# EAGLE board CT_schematic (EAGLE 7.6.0)

Size 100 x 80 mm. Coordinates in mm from the lower left corner, seen from the top.
Outline: 0,0 100,0 100,80 0,80 0,0
Copper layers (1*16): Top 0.035mm / dielectric 1.5mm / Bottom 0.035mm
Design rules "default": minimum track width 10mil, minimum drill 24mil, track to track 8mil, track to pad 8mil, pad to pad 8mil, via to via 8mil, smd to smd 8mil, copper to edge 40mil, drill to drill 8mil, minimum pad ring 10mil, minimum via ring 8mil, stop-mask expansion 4mil, vias tented up to drill 0mil, thermal gap 10mil

## Footprints (pad centres in the part's own frame; a part is rotated, then mirrored left to right if it is on the bottom)
C0603 = smd 0.8 x 0.8: 1 -0.762,0; 2 0.762,0
C0402 = smd 0.5 x 0.5: 1 -0.508,0; 2 0.508,0
C1210 = smd 1.2 x 2.5: 1 -1.524,0; 2 1.524,0
EXV-9H = smd 3.505 x 1.676: 1 -2.857,0; 2 2.857,0
L0603 = smd 0.8 x 0.8: 1 -0.762,0; 2 0.762,0
PJ-037B_PACKAGE = drill 3.7 square: 1 12,0 | drill 3.2 square: 2 6,0
R0603 = smd 0.8 x 0.8: 1 -0.762,0; 2 0.762,0
UFBGA132 = smd 0.32 x 0.32: A1 -2.75,2.75; A2 -2.25,2.75; A3 -1.75,2.75; A4 -1.25,2.75; A5 -0.75,2.75; A6 -0.25,2.75; A7 0.25,2.75; A8 0.75,2.75; A9 1.25,2.75; A10 1.75,2.75; A11 2.25,2.75; A12 2.75,2.75; B1 -2.75,2.25; B2 -2.25,2.25; B3 -1.75,2.25; B4 -1.25,2.25; B5 -0.75,2.25; B6 -0.25,2.25; B7 0.25,2.25; B8 0.75,2.25; B9 1.25,2.25; B10 1.75,2.25; B11 2.25,2.25; B12 2.75,2.25; C1 -2.75,1.75; C2 -2.25,1.75; C3 -1.75,1.75; C4 -1.25,1.75; C5 -0.75,1.75; C6 -0.25,1.75; C7 0.25,1.75; C8 0.75,1.75; C9 1.25,1.75; C10 1.75,1.75; C11 2.25,1.75; C12 2.75,1.75; D1 -2.75,1.25; D2 -2.25,1.25; D3 -1.75,1.25; D4 -1.25,1.25; D5 -0.75,1.25; D6 -0.25,1.25; D7 0.25,1.25; D8 0.75,1.25; D9 1.25,1.25; D10 1.75,1.25; D11 2.25,1.25; D12 2.75,1.25; E1 -2.75,0.75; E2 -2.25,0.75; E3 -1.75,0.75; E4 -1.25,0.75; E9 1.25,0.75; E10 1.75,0.75; E11 2.25,0.75; E12 2.75,0.75; F1 -2.75,0.25; F2 -2.25,0.25; F3 -1.75,0.25; F4 -1.25,0.25; F6 -0.25,0.25; F7 0.25,0.25; F9 1.25,0.25; F10 1.75,0.25; F11 2.25,0.25; F12 2.75,0.25; G1 -2.75,-0.25; G2 -2.25,-0.25; G3 -1.75,-0.25; G4 -1.25,-0.25; G6 -0.25,-0.25; G7 0.25,-0.25; G9 1.25,-0.25; G10 1.75,-0.25; G11 2.25,-0.25; G12 2.75,-0.25; H1 -2.75,-0.75; H2 -2.25,-0.75; H3 -1.75,-0.75; H4 -1.25,-0.75; H9 1.25,-0.75; H10 1.75,-0.75; H11 2.25,-0.75; H12 2.75,-0.75; J1 -2.75,-1.25; J2 -2.25,-1.25; J3 -1.75,-1.25; J4 -1.25,-1.25; J5 -0.75,-1.25; J6 -0.25,-1.25; J7 0.25,-1.25; J8 0.75,-1.25; J9 1.25,-1.25; J10 1.75,-1.25; J11 2.25,-1.25; J12 2.75,-1.25; K1 -2.75,-1.75; K2 -2.25,-1.75; K3 -1.75,-1.75; K4 -1.25,-1.75; K5 -0.75,-1.75; K6 -0.25,-1.75; K7 0.25,-1.75; K8 0.75,-1.75; K9 1.25,-1.75; K10 1.75,-1.75; K11 2.25,-1.75; K12 2.75,-1.75; L1 -2.75,-2.25; L2 -2.25,-2.25; L3 -1.75,-2.25; L4 -1.25,-2.25; L5 -0.75,-2.25; L6 -0.25,-2.25; L7 0.25,-2.25; L8 0.75,-2.25; L9 1.25,-2.25; L10 1.75,-2.25; L11 2.25,-2.25; L12 2.75,-2.25; M1 -2.75,-2.75; M2 -2.25,-2.75; M3 -1.75,-2.75; M4 -1.25,-2.75; M5 -0.75,-2.75; M6 -0.25,-2.75; M7 0.25,-2.75; M8 0.75,-2.75; M9 1.25,-2.75; M10 1.75,-2.75; M11 2.25,-2.75; M12 2.75,-2.75
TFBGA-153 = smd 0.3 x 0.3: A1 -3.25,3.25; A2 -2.75,3.25; A3 -2.25,3.25; A4 -1.75,3.25; A5 -1.25,3.25; A6 -0.75,3.25; A7 -0.25,3.25; A8 0.25,3.25; A9 0.75,3.25; A10 1.25,3.25; A11 1.75,3.25; A12 2.25,3.25; A13 2.75,3.25; A14 3.25,3.25; B1 -3.25,2.75; B2 -2.75,2.75; B3 -2.25,2.75; B4 -1.75,2.75; B5 -1.25,2.75; B6 -0.75,2.75; B7 -0.25,2.75; B8 0.25,2.75; B9 0.75,2.75; B10 1.25,2.75; B11 1.75,2.75; B12 2.25,2.75; B13 2.75,2.75; B14 3.25,2.75; C1 -3.25,2.25; C2 -2.75,2.25; C3 -2.25,2.25; C4 -1.75,2.25; C5 -1.25,2.25; C6 -0.75,2.25; C7 -0.25,2.25; C8 0.25,2.25; C9 0.75,2.25; C10 1.25,2.25; C11 1.75,2.25; C12 2.25,2.25; C13 2.75,2.25; C14 3.25,2.25; D1 -3.25,1.75; D2 -2.75,1.75; D3 -2.25,1.75; D4 -1.75,1.75; D12 2.25,1.75; D13 2.75,1.75; D14 3.25,1.75; E1 -3.25,1.25; E2 -2.75,1.25; E3 -2.25,1.25; E5 -1.25,1.25; E6 -0.75,1.25; E7 -0.25,1.25; E8 0.25,1.25; E9 0.75,1.25; E10 1.25,1.25; E12 2.25,1.25; E13 2.75,1.25; E14 3.25,1.25; F1 -3.25,0.75; F2 -2.75,0.75; F3 -2.25,0.75; F5 -1.25,0.75; F10 1.25,0.75; F12 2.25,0.75; F13 2.75,0.75; F14 3.25,0.75; G1 -3.25,0.25; G2 -2.75,0.25; G3 -2.25,0.25; G5 -1.25,0.25; G10 1.25,0.25; G12 2.25,0.25; G13 2.75,0.25; G14 3.25,0.25; H1 -3.25,-0.25; H2 -2.75,-0.25; H3 -2.25,-0.25; H5 -1.25,-0.25; H10 1.25,-0.25; H12 2.25,-0.25; H13 2.75,-0.25; H14 3.25,-0.25; J1 -3.25,-0.75; J2 -2.75,-0.75; J3 -2.25,-0.75; J5 -1.25,-0.75; J10 1.25,-0.75; J12 2.25,-0.75; J13 2.75,-0.75; J14 3.25,-0.75; K1 -3.25,-1.25; K2 -2.75,-1.25; K3 -2.25,-1.25; K5 -1.25,-1.25; K6 -0.75,-1.25; K7 -0.25,-1.25; K8 0.25,-1.25; K9 0.75,-1.25; K10 1.25,-1.25; K12 2.25,-1.25; K13 2.75,-1.25; K14 3.25,-1.25; L1 -3.25,-1.75; L2 -2.75,-1.75; L3 -2.25,-1.75; L12 2.25,-1.75; L13 2.75,-1.75; L14 3.25,-1.75; M1 -3.25,-2.25; M2 -2.75,-2.25; M3 -2.25,-2.25; M4 -1.75,-2.25; M5 -1.25,-2.25; M6 -0.75,-2.25; M7 -0.25,-2.25; M8 0.25,-2.25; M9 0.75,-2.25; M10 1.25,-2.25; M11 1.75,-2.25; M12 2.25,-2.25; M13 2.75,-2.25; M14 3.25,-2.25; N1 -3.25,-2.75; N2 -2.75,-2.75; N3 -2.25,-2.75; N4 -1.75,-2.75; N5 -1.25,-2.75; N6 -0.75,-2.75; N7 -0.25,-2.75; N8 0.25,-2.75; N9 0.75,-2.75; N10 1.25,-2.75; N11 1.75,-2.75; N12 2.25,-2.75; N13 2.75,-2.75; N14 3.25,-2.75; P1 -3.25,-3.25; P2 -2.75,-3.25; P3 -2.25,-3.25; P4 -1.75,-3.25; P5 -1.25,-3.25; P6 -0.75,-3.25; P7 -0.25,-3.25; P8 0.25,-3.25; P9 0.75,-3.25; P10 1.25,-3.25; P11 1.75,-3.25; P12 2.25,-3.25; P13 2.75,-3.25; P14 3.25,-3.25
PC28F512P33BFD = smd 0.45 x 0.45: A1 0,0; A2 1,0; A3 2,0; A4 3,0; A5 4,0; A6 5,0; A7 6,0; A8 7,0; B1 0,-1; B2 1,-1; B3 2,-1; B4 3,-1; B5 4,-1; B6 5,-1; B7 6,-1; B8 7,-1; C1 0,-2; C2 1,-2; C3 2,-2; C4 3,-2; C5 4,-2; C6 5,-2; C7 6,-2; C8 7,-2; D1 0,-3; D2 1,-3; D3 2,-3; D4 3,-3; D5 4,-3; D6 5,-3; D7 6,-3; D8 7,-3; E1 0,-4; E2 1,-4; E3 2,-4; E4 3,-4; E5 4,-4; E6 5,-4; E7 6,-4; E8 7,-4; F1 0,-5; F2 1,-5; F3 2,-5; F4 3,-5; F5 4,-5; F6 5,-5; F7 6,-5; F8 7,-5; G1 0,-6; G2 1,-6; G3 2,-6; G4 3,-6; G5 4,-6; G6 5,-6; G7 6,-6; G8 7,-6; H1 0,-7; H2 1,-7; H3 2,-7; H4 3,-7; H5 4,-7; H6 5,-7; H7 6,-7; H8 7,-7
ABS07-32.768KHZ-7-T = smd 1.1 x 2.4: 1 -2.5,0; 2 0,0
ASFL1 = smd 1.7 x 1.5: 1 -1.27,-1.1; 2 1.27,-1.1; 3 1.27,1.1; 4 -1.27,1.1
WSON-8 = smd 0.3 x 0.6: 1 -0.75,0; 2 0.05,0; 3 0.85,0; 4 1.65,0; 5 1.65,3.8; 6 0.85,3.8; 7 0.05,3.8; 8 -0.75,3.8 | smd 3 x 2.6: PAD 0.45,1.9
SON-6 = smd 0.55 x 0.3: 1 -0.355,0.5 | smd 0.52 x 0.3: 2 -0.37,0; 3 -0.37,-0.5; 4 0.37,-0.5; 5 0.37,0; 6 0.37,0.5
SW_4-1437565-2 = smd 1.4 x 2.1: 1 -2.23,4.55; 2 -2.23,-4.55; 3 2.23,4.55; 4 2.23,-4.55
LGM67K-G1J2-24-Z = smd 0.8 x 1.4: A -2,0; C 0,0
NC7SZ125M5X = smd 1.3 x 0.7: 1 -1.3,0.95; 2 -1.3,0; 3 -1.3,-0.95; 4 1.3,-0.95; 5 1.3,0.95
DUMMY_PACKAGE_176 = drill 0.3: 1 0,-1; 2 1.5,-1; 3 3,-1

## Placement (x,y rotation side)
C1  1e-07  [C0603]  -30.48,60.96 0 top  (outside the outline)
C2  1e-07  [C0603]  -34.29,60.96 0 top  (outside the outline)
C3  1e-07  [C0603]  -38.1,60.96 0 top  (outside the outline)
C4  1e-07  [C0603]  -41.91,60.96 0 top  (outside the outline)
C5  1e-07  [C0603]  -45.72,60.96 0 top  (outside the outline)
C6  1e-07  [C0603]  -49.53,60.96 0 top  (outside the outline)
C7  1e-07  [C0603]  -53.34,60.96 0 top  (outside the outline)
C8  4.7e-06  [C0603]  -15.24,60.96 0 top  (outside the outline)
C9  1e-07  [C0603]  -57.15,60.96 0 top  (outside the outline)
C10  1e-08  [C0603]  -60.96,60.96 0 top  (outside the outline)
C11  1e-06  [C0603]  -64.77,60.96 0 top  (outside the outline)
C12  1e-11  [C0402]  -45.72,66.04 0 top  (outside the outline)
C13  1e-11  [C0402]  -49.53,66.04 0 top  (outside the outline)
C14  1e-07  [C0402]  -53.34,66.04 0 top  (outside the outline)
C15  2.2e-06  [C0603]  -19.05,60.96 0 top  (outside the outline)
C16  2.2e-06  [C0603]  -22.86,60.96 0 top  (outside the outline)
C17  1e-07  [C0402]  -57.15,66.04 0 top  (outside the outline)
C18  1e-07  [C0402]  -60.96,66.04 0 top  (outside the outline)
C19  2.2e-06  [C0603]  -26.67,60.96 0 top  (outside the outline)
C20  1e-07  [C0402]  -64.77,66.04 0 top  (outside the outline)
C21  1e-08  [C0402]  -15.24,71.12 0 top  (outside the outline)
C22  1e-07  [C0402]  -19.05,71.12 0 top  (outside the outline)
C23  1e-08  [C0402]  -22.86,71.12 0 top  (outside the outline)
C24  1e-07  [C0402]  -26.67,71.12 0 top  (outside the outline)
C25  1e-08  [C0402]  -30.48,71.12 0 top  (outside the outline)
C26  1e-08  [C0402]  -34.29,71.12 0 top  (outside the outline)
C27  1e-08  [C0402]  -38.1,71.12 0 top  (outside the outline)
C28  1e-05  [C1210]  -48.26,41.91 0 top  (outside the outline)
C29  1e-05  [C1210]  -54.61,41.91 0 top  (outside the outline)
C30  1e-07  [C0402]  -41.91,71.12 0 top  (outside the outline)
C31  0.0001  [EXV-9H]  -35.56,34.29 0 top  (outside the outline)
C32  0.0001  [EXV-9H]  -46.99,34.29 0 top  (outside the outline)
C33  1e-08  [C0402]  -45.72,71.12 0 top  (outside the outline)
C34  1e-08  [C0402]  -49.53,71.12 0 top  (outside the outline)
C35  1e-08  [C0402]  -53.34,71.12 0 top  (outside the outline)
F1  240.0  [L0603]  -15.24,66.04 0 top  (outside the outline)
J1  PJ-037B  [PJ-037B_PACKAGE]  -41.91,7.62 0 top  (outside the outline)
R2  1000.0  [R0603]  -19.05,66.04 0 top  (outside the outline)
R4  4700.0  [R0603]  -22.86,66.04 0 top  (outside the outline)
R5  4700.0  [R0603]  -26.67,66.04 0 top  (outside the outline)
R6  4700.0  [R0603]  -30.48,66.04 0 top  (outside the outline)
R7  10000.0  [R0603]  -36.83,49.53 0 top  (outside the outline)
R8  34000.0  [R0603]  -41.91,49.53 0 top  (outside the outline)
R9  34000.0  [R0603]  -46.99,49.53 0 top  (outside the outline)
R10  34000.0  [R0603]  -52.07,49.53 0 top  (outside the outline)
R11  34000.0  [R0603]  -57.15,49.53 0 top  (outside the outline)
R12  34000.0  [R0603]  -62.23,49.53 0 top  (outside the outline)
R13  34000.0  [R0603]  -67.31,49.53 0 top  (outside the outline)
R14  34000.0  [R0603]  -15.24,55.88 0 top  (outside the outline)
R15  34000.0  [R0603]  -20.32,55.88 0 top  (outside the outline)
R16  34000.0  [R0603]  -25.4,55.88 0 top  (outside the outline)
R17  34000.0  [R0603]  -30.48,55.88 0 top  (outside the outline)
R18  10000.0  [R0603]  -35.56,55.88 0 top  (outside the outline)
R19  10000.0  [R0603]  -40.64,55.88 0 top  (outside the outline)
R20  10000.0  [R0603]  -45.72,55.88 0 top  (outside the outline)
R21  10000.0  [R0603]  -50.8,55.88 0 top  (outside the outline)
R22  10000.0  [R0603]  -55.88,55.88 0 top  (outside the outline)
R23  100000.0  [R0603]  -21.59,49.53 0 top  (outside the outline)
R24  2231.0  [R0603]  -34.29,66.04 0 top  (outside the outline)
R25  1000.0  [R0603]  -38.1,66.04 0 top  (outside the outline)
R26  10000.0  [R0603]  -60.96,55.88 0 top  (outside the outline)
R27  10000.0  [R0603]  -66.04,55.88 0 top  (outside the outline)
R28  9100.0  [R0603]  -41.91,66.04 0 top  (outside the outline)
R29  680000.0  [R0603]  -26.67,49.53 0 top  (outside the outline)
R30  120000.0  [R0603]  -31.75,49.53 0 top  (outside the outline)
U1  STM32L151QDH6  [UFBGA132]  -44.45,24.13 0 top  (outside the outline)
U2  mtfc4gmcdm  [TFBGA-153]  -20.32,8.89 0 top  (outside the outline)
U3  PC28F512P33BFD  [PC28F512P33BFD]  -58.42,10.16 0 top  (outside the outline)
U4  ABS07-32.768KHZ-7-T  [ABS07-32.768KHZ-7-T]  -27.94,43.18 0 top  (outside the outline)
U5  ASFL1-25MHZ-NCS  [ASFL1]  -26.67,34.29 0 top  (outside the outline)
U6  LP3878SDX-ADJ/NOPB  [WSON-8]  -66.04,20.32 0 top  (outside the outline)
U7  TPS3895ADRYR  [SON-6]  -62.23,69.85 0 top  (outside the outline)
U8  4-1437565-2  [SW_4-1437565-2]  -27.94,24.13 0 top  (outside the outline)
U9  Q65110A2395  [LGM67K-G1J2-24-Z]  -36.83,41.91 0 top  (outside the outline)
U10  nc7sz125m5x  [NC7SZ125M5X]  -59.69,40.64 0 top  (outside the outline)
U11  nc7sz125m5x  [NC7SZ125M5X]  -66.04,40.64 0 top  (outside the outline)
U12  nc7sz125m5x  [NC7SZ125M5X]  -15.24,49.53 0 top  (outside the outline)
U13  Dummy  [DUMMY_PACKAGE_176]  -59.69,71.12 0 top  (outside the outline)

## Library data of the parts
C1-C35 F1 J1 R2 R4-R30 U1-U13 = circuit_tree

## Nets
CLK_CRYSTAL_U1_D1: C12.1 U1.D1 U4.1
CLK_CRYSTAL_U1_E1: C13.1 U1.E1 U4.2
CLK_U1_F1: U1.F1 U5.3
GND: C1.2 C2.2 C3.2 C4.2 C5.2 C6.2 C7.2 C8.2 C9.2 C10.2 C11.2 C12.2 C13.2 C14.2 C15.2 C16.2 C17.2 C18.2 C19.2 C20.2 C21.2 C22.2 C23.2 C24.2 C25.2 C26.2 C27.2 C28.2 C29.2 C30.2 C31.2 C32.2 C33.2 C34.2 C35.2 J1.2 R2.2 R7.2 R25.2 R28.2 R30.2 U1.D3 U1.E3 U1.F2 U1.F6 U1.F7 U1.F11 U1.F12 U1.J1 U2.C4 U2.E7 U2.G5 U2.H10 U2.K8 U2.N2 U2.N5 U2.P4 U2.P6 U3.B2 U3.H2 U3.H4 U3.H6 U5.2 U6.3 U6.PAD U7.2 U9.C U10.1 U10.3 U11.1 U11.3 U12.1 U12.3 U13.1
NET_U1_A4: R7.1 U1.A4
NET_U1_E2: C9.1 U1.E2
NET_U1_H2: R6.1 U1.H2 U12.4
NET_U1_M1: C10.1 C11.1 F1.1 U1.L1 U1.M1
NET_U1_M5: U9.A
NET_U1_M6: U8.3 U8.4
NET_U2_C2: C16.1 C17.1 U2.C2
NET_U2_K5: R4.1 U2.K5 U10.4
NET_U3_A4: C24.1 C25.1 U3.A4
NET_U3_C6: R21.1 U3.C6
NET_U3_D4: R5.1 U3.D4 U11.4
NET_U6_1: C27.1 U6.1
NET_U6_6: R24.2 R25.1 U6.6
NET_U6_8: R23.1 U6.8
NET_U7_1: R27.1 R28.1 U7.1
NET_U7_3: R29.2 R30.1 U7.3
NET_U7_4: R26.1 U7.4 U10.2 U11.2 U12.2
NET_U8_1: R2.1 U8.1 U8.2
PROC_ADC_IN20: U1.K11 U13.2
PROC_ADC_IN28: U1.G4 U13.3
PROC_FSMC_A6: U1.J7 U3.C2
PROC_FSMC_A7: U1.K7 U3.A3
PROC_FSMC_A8: U1.J8 U3.B3
PROC_FSMC_A9: U1.J9 U3.C3
PROC_FSMC_A10: U1.H9 U3.D3
PROC_FSMC_A11: U1.G9 U3.C4
PROC_FSMC_A12: U1.G10 U3.A5
PROC_FSMC_A13: U1.F9 U3.B5
PROC_FSMC_A14: U1.F10 U3.C5
PROC_FSMC_A16: U1.J11 U3.D8
PROC_FSMC_A17: U1.J10 U3.A7
PROC_FSMC_A18: U1.H12 U3.B7
PROC_FSMC_A19: U1.A1 U3.C7
PROC_FSMC_A20: U1.B1 U3.C8
PROC_FSMC_A21: U1.C2 U3.A8
PROC_FSMC_A23: U1.B2 U3.H8
PROC_FSMC_CLK: U1.B8 U3.E6
PROC_FSMC_D0: U1.H11 U3.F2
PROC_FSMC_D1: U1.H10 U3.E2
PROC_FSMC_D2: U1.C9 U3.G3
PROC_FSMC_D3: U1.B9 U3.E4
PROC_FSMC_D4: U1.M7 U3.E5
PROC_FSMC_D5: U1.L7 U3.G5
PROC_FSMC_D6: U1.M8 U3.G6
PROC_FSMC_D7: U1.L8 U3.H7
PROC_FSMC_D8: U1.M9 U3.E1
PROC_FSMC_D9: U1.L9 U3.E3
PROC_FSMC_D10: U1.M10 U3.F3
PROC_FSMC_D11: U1.M11 U3.F4
PROC_FSMC_D12: U1.M12 U3.F5
PROC_FSMC_D13: U1.K9 U3.H5
PROC_FSMC_D14: U3.G7
PROC_FSMC_D15: U3.E7
PROC_FSMC_NE2: R19.1 U1.D9 U3.B4
PROC_FSMC_NL: R18.1 U1.B4 U3.F6
PROC_FSMC_NOE: R20.1 U1.B7 U3.F8
PROC_FSMC_NWAIT: U1.B6 U3.F7
PROC_FSMC_NWE: R22.1 U1.A6 U3.G8
PROC_SDIO_CK: R17.1 U1.B10 U2.M6
PROC_SDIO_CMD: R16.1 U1.C8 U2.M5
PROC_SDIO_D0: R8.1 U1.E10 U2.A3
PROC_SDIO_D1: R9.1 U1.D12 U2.A4
PROC_SDIO_D2: R10.1 U1.B11 U2.A5
PROC_SDIO_D3: R11.1 U1.C10 U2.B2
PROC_SDIO_D4: R12.1 U1.A3 U2.B3
PROC_SDIO_D5: R13.1 U1.B3 U2.B4
PROC_SDIO_D6: R14.1 U1.E12 U2.B5
PROC_SDIO_D7: R15.1 U1.E11 U2.B6
VCC_S1_13V6: C28.1 C31.1 C32.1 J1.1 R23.2 U6.4
VCC_TIER1_3V3: C1.1 C2.1 C3.1 C4.1 C5.1 C6.1 C7.1 C8.1 C14.1 C15.1 C18.1 C19.1 C20.1 C21.1 C22.1 C23.1 C26.1 C29.1 C30.1 C33.1 C34.1 C35.1 F1.2 R4.2 R5.2 R6.2 R8.2 R9.2 R10.2 R11.2 R12.2 R13.2 R14.2 R15.2 R16.2 R17.2 R18.2 R19.2 R20.2 R21.2 R22.2 R24.1 R26.2 R27.2 R29.1 U1.C4 U1.G2 U1.G6 U1.G7 U1.G11 U1.G12 U1.H3 U2.C6 U2.E6 U2.F5 U2.J10 U2.K9 U2.M4 U2.N4 U2.P3 U2.P5 U3.A6 U3.D5 U3.D6 U3.G4 U3.H3 U5.4 U6.5 U7.6 U10.5 U11.5 U12.5

## Tracks (layer width: path | path; a pad name or v marks a point on that pad's centre or on a via)
CLK_CRYSTAL_U1_D1  (2 unrouted)
CLK_CRYSTAL_U1_E1  (2 unrouted)
CLK_U1_F1  (1 unrouted)
GND  (73 unrouted)
NET_U1_A4  (1 unrouted)
NET_U1_E2  (1 unrouted)
NET_U1_H2  (2 unrouted)
NET_U1_M1  (4 unrouted)
NET_U1_M6  (1 unrouted)
NET_U2_C2  (2 unrouted)
NET_U2_K5  (2 unrouted)
NET_U3_A4  (2 unrouted)
NET_U3_C6  (1 unrouted)
NET_U3_D4  (2 unrouted)
NET_U6_1  (1 unrouted)
NET_U6_6  (2 unrouted)
NET_U6_8  (1 unrouted)
NET_U7_1  (2 unrouted)
NET_U7_3  (2 unrouted)
NET_U7_4  (4 unrouted)
NET_U8_1  (2 unrouted)
PROC_ADC_IN20  (1 unrouted)
PROC_ADC_IN28  (1 unrouted)
PROC_FSMC_A6  (1 unrouted)
PROC_FSMC_A7  (1 unrouted)
PROC_FSMC_A8  (1 unrouted)
PROC_FSMC_A9  (1 unrouted)
PROC_FSMC_A10  (1 unrouted)
PROC_FSMC_A11  (1 unrouted)
PROC_FSMC_A12  (1 unrouted)
PROC_FSMC_A13  (1 unrouted)
PROC_FSMC_A14  (1 unrouted)
PROC_FSMC_A16  (1 unrouted)
PROC_FSMC_A17  (1 unrouted)
PROC_FSMC_A18  (1 unrouted)
PROC_FSMC_A19  (1 unrouted)
PROC_FSMC_A20  (1 unrouted)
PROC_FSMC_A21  (1 unrouted)
PROC_FSMC_A23  (1 unrouted)
PROC_FSMC_CLK  (1 unrouted)
PROC_FSMC_D0  (1 unrouted)
PROC_FSMC_D1  (1 unrouted)
PROC_FSMC_D2  (1 unrouted)
PROC_FSMC_D3  (1 unrouted)
PROC_FSMC_D4  (1 unrouted)
PROC_FSMC_D5  (1 unrouted)
PROC_FSMC_D6  (1 unrouted)
PROC_FSMC_D7  (1 unrouted)
PROC_FSMC_D8  (1 unrouted)
PROC_FSMC_D9  (1 unrouted)
PROC_FSMC_D10  (1 unrouted)
PROC_FSMC_D11  (1 unrouted)
PROC_FSMC_D12  (1 unrouted)
PROC_FSMC_D13  (1 unrouted)
PROC_FSMC_NE2  (2 unrouted)
PROC_FSMC_NL  (2 unrouted)
PROC_FSMC_NOE  (2 unrouted)
PROC_FSMC_NWAIT  (1 unrouted)
PROC_FSMC_NWE  (2 unrouted)
PROC_SDIO_CK  (2 unrouted)
PROC_SDIO_CMD  (2 unrouted)
PROC_SDIO_D0  (2 unrouted)
PROC_SDIO_D1  (2 unrouted)
PROC_SDIO_D2  (2 unrouted)
PROC_SDIO_D3  (2 unrouted)
PROC_SDIO_D4  (2 unrouted)
PROC_SDIO_D5  (2 unrouted)
PROC_SDIO_D6  (2 unrouted)
PROC_SDIO_D7  (2 unrouted)
VCC_S1_13V6  (5 unrouted)
VCC_TIER1_3V3  (71 unrouted)